# EAGLE board PIC32try1 (EAGLE 5.12)

Size 50 x 50 mm. Coordinates in mm from the lower left corner, seen from the top.
Outline: 0,0 50,0 50,50 0,50 0,0
Copper layers (1*16): Top 0.035mm / dielectric 1.5mm / Bottom 0.035mm
Design rules "default": minimum track width 10mil, minimum drill 24mil, track to track 8mil, track to pad 8mil, pad to pad 8mil, via to via 8mil, smd to smd 8mil, copper to edge 40mil, drill to drill 8mil, minimum pad ring 10mil, minimum via ring 8mil, stop-mask expansion 4mil, vias tented up to drill 0mil, thermal gap 10mil

## Footprints (pad centres in the part's own frame; a part is rotated, then mirrored left to right if it is on the bottom)
CRYST2 = drill 0.7 pad 1.676 round: P$1 0,0; P$2 -2.54,0; P$3 2.54,0
C025-025X050 = drill 0.813 octagon: 1 -1.27,0; 2 1.27,0
LED3MM = drill 0.813 octagon: A -1.27,0; K 1.27,0
1X05 = drill 1.016 pad 1.88 square: 1 0,0 | drill 1.016 pad 1.88 round: 2 2.54,0; 3 5.08,0; 4 7.62,0; 5 10.16,0
0309/12 = drill 0.813 octagon: 1 -6.35,0; 2 6.35,0
DIL28-3 = drill 0.813 long: 1 -16.51,-3.81; 2 -13.97,-3.81; 3 -11.43,-3.81; 4 -8.89,-3.81; 5 -6.35,-3.81; 6 -3.81,-3.81; 7 -1.27,-3.81; 8 1.27,-3.81; 9 3.81,-3.81; 10 6.35,-3.81; 11 8.89,-3.81; 12 11.43,-3.81; 13 13.97,-3.81; 14 16.51,-3.81; 15 16.51,3.81; 16 13.97,3.81; 17 11.43,3.81; 18 8.89,3.81; 19 6.35,3.81; 20 3.81,3.81; 21 1.27,3.81; 22 -1.27,3.81; 23 -3.81,3.81; 24 -6.35,3.81; 25 -8.89,3.81; 26 -11.43,3.81; 27 -13.97,3.81; 28 -16.51,3.81
1X03 = drill 1.016 pad 1.88 square: 1 0,0 | drill 1.016 pad 1.88 round: 2 2.54,0; 3 5.08,0
CAP_POL_D = drill 0.7 pad 1.651 square: 1 1.27,0 | drill 0.7 pad 1.651 round: 2 -1.27,0
1X04 = drill 1.016 pad 1.88 square: 1 0,0 | drill 1.016 pad 1.88 round: 2 2.54,0; 3 5.08,0; 4 7.62,0
USB-MINIB = drill 0.8 round: D+ 4.064,0; D- 2.489,0.914; GND 4.064,-1.778; ID 2.489,-0.838; VBUS 4.064,1.702 | drill 1.9 round: P$6 -1.27,-3.65; P$7 -1.27,3.65
TO220 = drill 1.016 long: 1 -2.54,0; 2 0,0; 3 2.54,0

## Placement (x,y rotation side)
8MHZ  CRYST2  [CRYST2]  -12.7,25.4 270 top  (outside the outline)
C1  0.1UF  [C025-025X050]  20.32,46.99 0 top
C2  0.1UF  [C025-025X050]  -36.83,10.16 0 top  (outside the outline)
C3  0.1 UF  [C025-025X050]  -24.13,-5.08 0 top  (outside the outline)
LED1  [LED3MM]  -20.32,63.5 0 top  (outside the outline)
LED2  [LED3MM]  -30.48,63.5 0 top  (outside the outline)
LED4  [LED3MM]  -50.8,63.5 0 top  (outside the outline)
PICKIT3  1X05_HEADER  [1X05]  7.62,2.54 0 top
R1  [0309/12]  -30.48,50.8 0 top  (outside the outline)
R2  [0309/12]  -45.72,50.8 0 top  (outside the outline)
R3  [0309/12]  -20.32,57.15 0 top  (outside the outline)
R4  [0309/12]  -35.56,57.15 0 top  (outside the outline)
R5  [0309/12]  -50.8,57.15 0 top  (outside the outline)
U$1  PIC32  [DIL28-3]  25.4,20.32 270 top
U$3  PUSHBUTTON  [1X03]  -55.88,45.72 0 top  (outside the outline)
U$4  CAP_POL  [CAP_POL_D]  -55.88,19.05 0 top  (outside the outline)
U$5  PUSHBUTTON  [1X03]  -20.32,52.07 0 top  (outside the outline)
U$6  1X04_HEADER  [1X04]  1.27,35.56 270 top
U$8  1X04_HEADER  [1X04]  1.27,15.24 90 top
U$9  1X04_HEADER  [1X04]  1.27,2.54 90 top
U$10  1X04_HEADER  [1X04]  48.26,15.24 90 top
U$11  1X04_HEADER  [1X04]  48.26,10.16 270 top
U$15  USB  [USB-MINIB]  6.35,44.45 270 top
U$16  LD1117  [TO220]  15.24,43.18 90 top
U$17  10UF  [CAP_POL_D]  20.32,41.91 90 top

## Library data of the parts
8MHZ C1-C3 PICKIT3 U$1 U$3-U$6 U$8-U$11 U$15-U$17 = ME433
LED1 LED2 LED4 = led
R1-R5 = resistor

## Nets
3.3V: C2.1 C3.1 PICKIT3.2 R1.2 R5.1 U$1.13 U$1.23 U$1.28 U$9.4 U$17.1
5V: U$11.4
A0: U$1.2 U$6.2
A1: U$1.3 U$6.3
A4: U$1.12 U$9.1
B0: PICKIT3.4 U$1.4 U$6.4
B1: PICKIT3.5 U$1.5 U$8.1
B2: U$1.6 U$8.2
B3: U$1.7 U$8.3
B4: U$1.11 U$8.4
B5: U$9.2
B7: R4.1 U$1.16 U$11.2
B8: U$1.17 U$11.1
B9: U$1.18 U$10.4
B13: R5.2 U$1.24
B14: U$1.25
B15: R3.2 U$1.26
D+: U$1.21 U$15.D+
D-: U$1.22 U$15.D-
GND: 8MHZ.P$2 C1.2 C2.2 C3.2 LED2.K LED4.K PICKIT3.3 U$1.8 U$1.19 U$1.27 U$4.2 U$9.3 U$11.3 U$15.GND U$16.1 U$17.2
MCLR: PICKIT3.1 R1.1 U$1.1 U$6.1
N$2: C1.1 U$16.3
N$3: U$15.VBUS
N$4: LED1.K
N$5: LED1.A
N$6: LED2.A R3.1
N$7: LED4.A R4.2
N$8: 8MHZ.P$1 U$1.9
N$9: 8MHZ.P$3 U$1.10
N$10: U$1.15
N$22: U$1.20 U$4.1
R13: U$10.3
R14: U$10.2
R15: U$10.1

## Tracks (layer width: path | path; a pad name or v marks a point on that pad's centre or on a via)
3.3V  (9 unrouted)
A0  (1 unrouted)
A1  (1 unrouted)
A4  (1 unrouted)
B0  (2 unrouted)
B1  (2 unrouted)
B2  (1 unrouted)
B3  (1 unrouted)
B4  (1 unrouted)
B7  (2 unrouted)
B8  (1 unrouted)
B9  (1 unrouted)
B13  (1 unrouted)
B15  (1 unrouted)
D+  (1 unrouted)
D-  (1 unrouted)
GND  (15 unrouted)
MCLR  (3 unrouted)
N$2  (1 unrouted)
N$6  (1 unrouted)
N$7  (1 unrouted)
N$8  (1 unrouted)
N$9  (1 unrouted)
N$22  (1 unrouted)